# Altium PCB Sensor_voltagV1.2.PcbDoc
Units mm, origin at the board's own origin, x right, y up, seen from the top; angles counter-clockwise.
Board outline 65.4 x 19.09 mm, 2 copper layers (Top Layer, Bottom Layer), stack 1.58 mm thick; 38 components, 18 nets, 94 pads, 17 vias.
Unrouted connection lines stored in the file: 1.
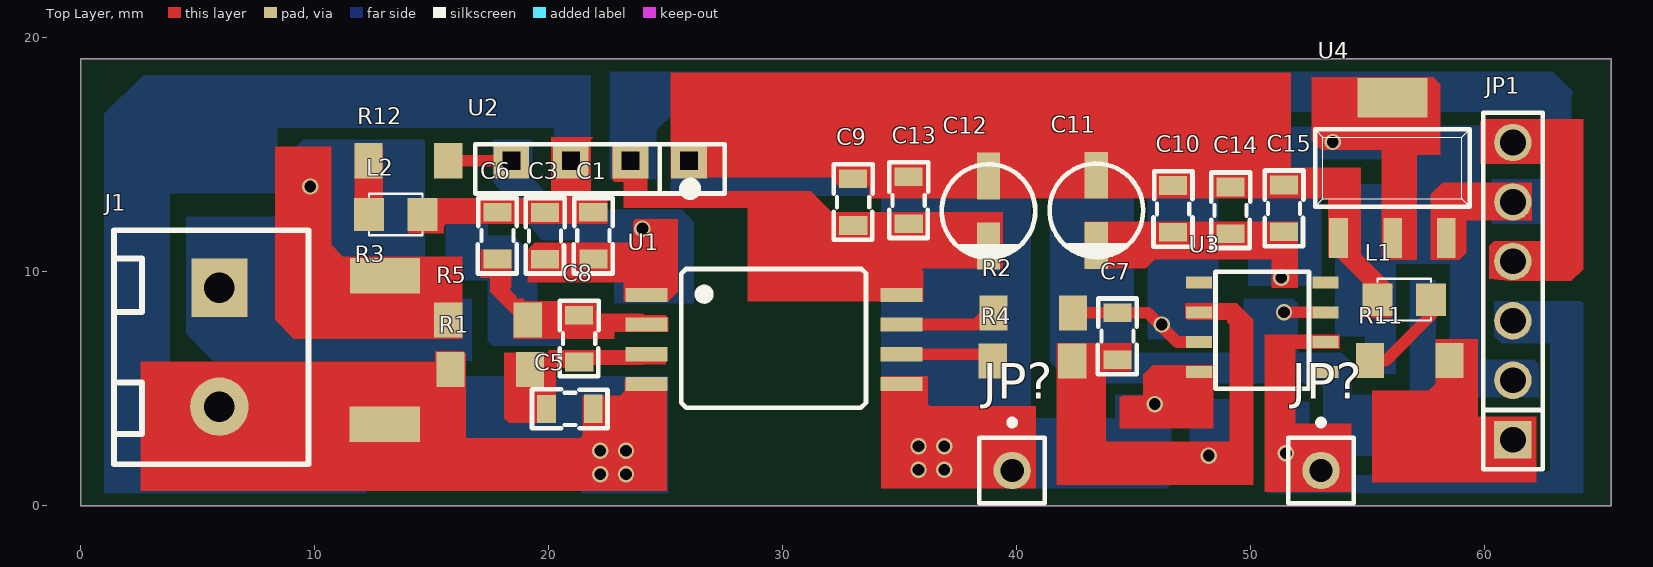
[diagram p0: Top Layer view]
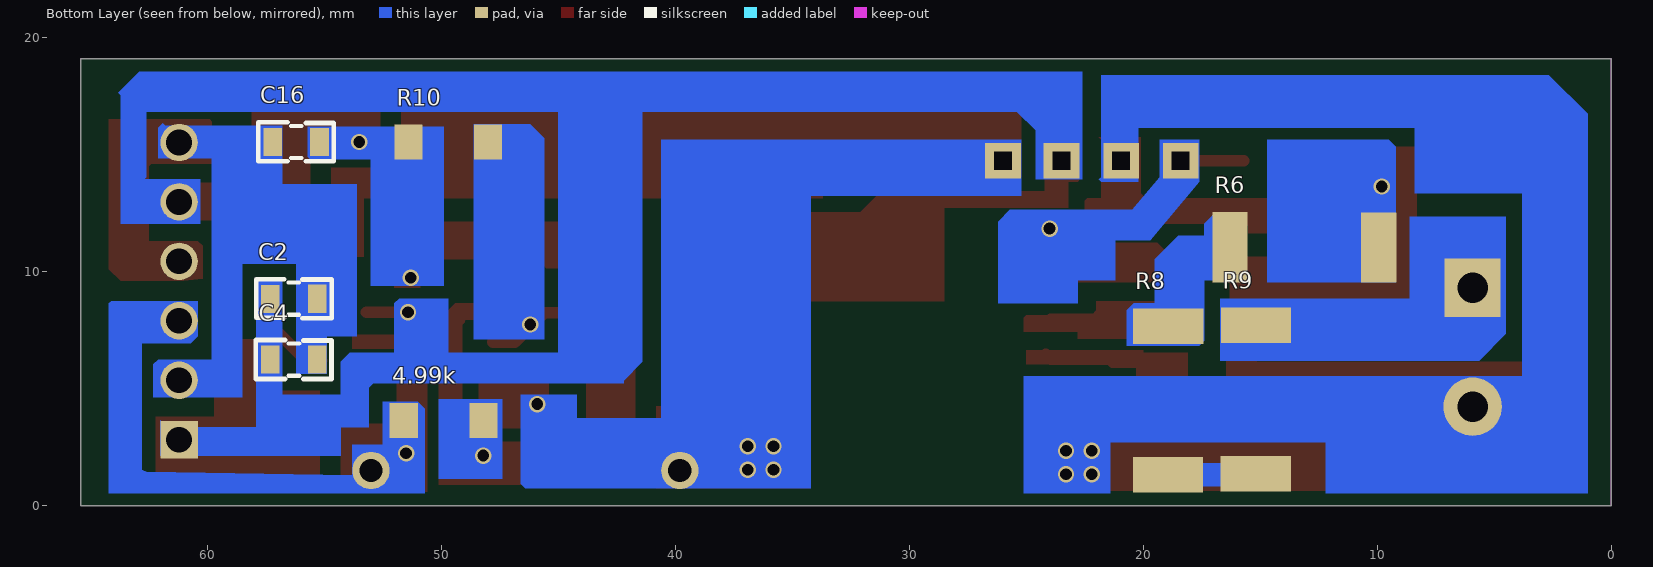
[diagram p1: Bottom Layer view, seen from below]
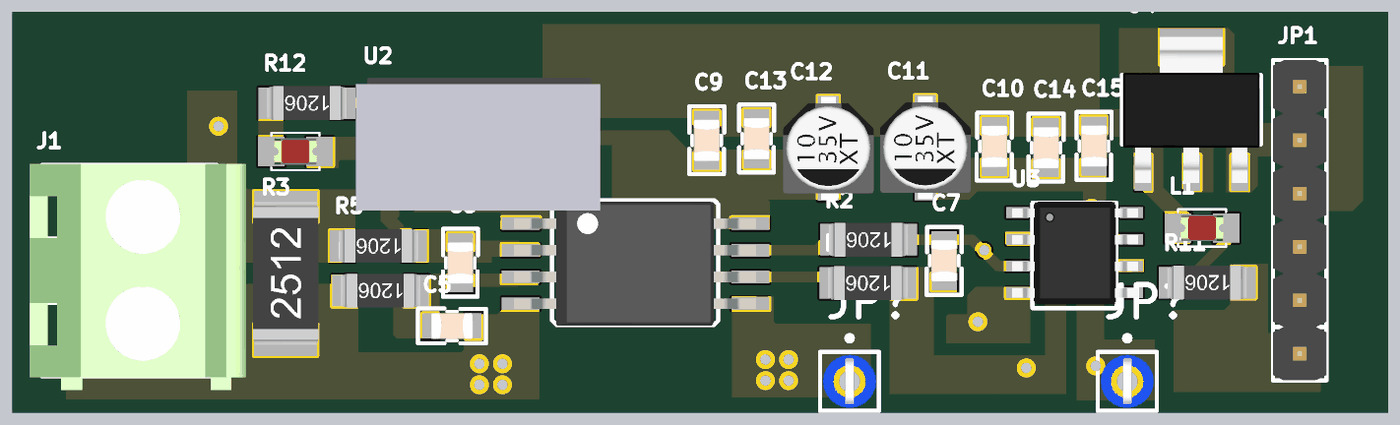
[diagram p2: 3D render of the assembled board from above, using the file's embedded part models]
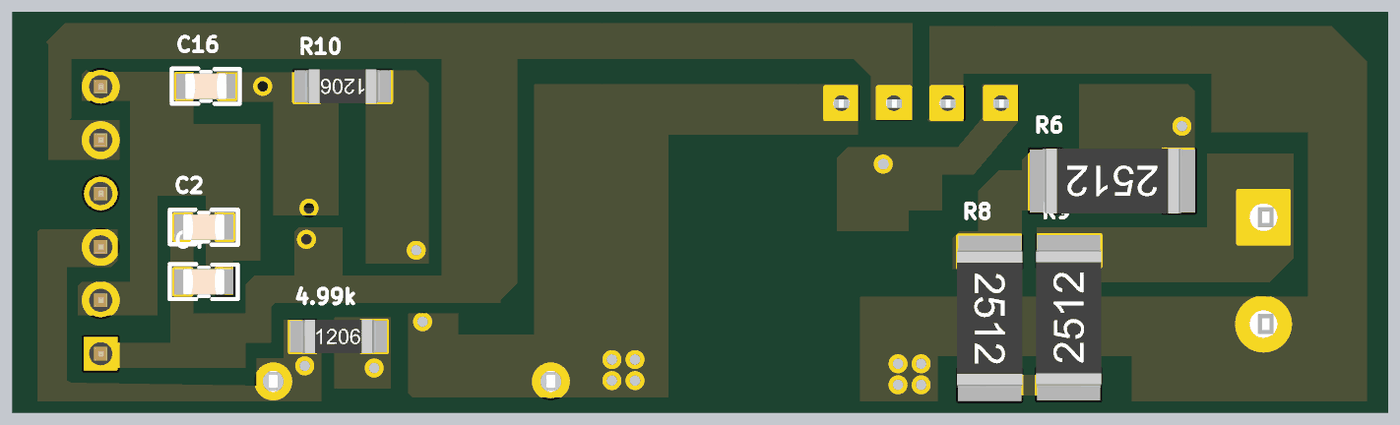
[diagram p3: 3D render of the assembled board from below, using the file's embedded part models]

## Layer stack, top to bottom
Top Solder: solder mask 0.01, Solder Resist, Dk 3.5
Top Layer: signal copper 0.035
Dielectric 1: dielectric 1.51, FR-4, Dk 4.8
Bottom Layer: signal copper 0.035
Bottom Solder: solder mask 0.01, Solder Resist, Dk 3.5

## Board outline
0,0 65.4,0 65.4,19.092 0,19.092

## Design rules (kind name [scope] priority, off if disabled: settings)
Clearance [All] p1: gap=0.5
PolygonConnect [All] p1: connectstyle=Relief reliefconductorwidth=0.254 reliefentries=4 polygonreliefangle="90 Angle" airgapwidth=0.254
RoutingVias [All] p1: holewidth=0.711 width=1.27 viastyle="Through Hole" minholewidth=0.711 minwidth=1.27 maxholewidth=0.711 maxwidth=1.27
SolderMaskExpansion [All] p1: expansion=0.102
Width [All] p1: maxlimit=2 minlimit=0.5 preferedwidth=1
30 further rules are at their usual default settings.

## Components (designator, comment, footprint, x,y, rotation, side; value= is the part's Value field where it differs from the comment)
4.99k "10K" RES1206 49.9,3.638 r180 bottom
C1 "0.1uF" "Tu 0805_N" 21.9,11.538 r90 top
C2 "0.1uF" "Tu 0805_N" 56.3,8.838 r0 bottom
C3 "1uF" "Tu 0805_N" 19.84,11.528 r270 top
C4 "1uF" "Tu 0805_N" 56.3,6.241 r180 bottom
C5 "1nF" "Tu 0805_N" 20.9,4.137 r0 top
C6 "1nF" "Tu 0805_N" 17.8,11.538 r90 top
C7 "10nF" "Tu 0805_N" 44.297,7.238 r90 top
C8 "10nF" "Tu 0805_N" 21.3,7.137 r270 top
C9 "1uF" "Tu 0805_N" 33.01,12.968 r270 top
C10 "1uF" "Tu 0805_N" 46.68,12.678 r90 top
C11 "10uF_16V" tu_4x5.4mm 43.4,12.618 r90 top
C12 "10uF_16V" tu_4x5.4mm 38.79,12.587 r90 top
C13 "10nF" "Tu 0805_N" 35.38,13.047 r270 top
C14 "10nF" "Tu 0805_N" 49.14,12.618 r270 top
C15 "10nF" "Tu 0805_N" 51.42,12.698 r270 top
C16 "10nF" "Tu 0805_N" 56.2,15.541 r180 bottom
J1 "domino" domino_2pin_5.08mm 5.92,6.767 r270 top
JP1 "JP 1x6 2.54" "JP 1X6 DT" 61.2,2.818 r90 top
JP? "JP 1x1 2.54" test_point 53,1.5 r0 top
JP? "JP 1x1 2.54" test_point 39.8,1.5 r0 top
L1 "LED 0805" LED-0805-Red 57.7,8.798 r180 top
L2 "LED 0805" LED-0805-Red 12.314,12.438 r0 top
R1 "10K" RES1206 17.5,5.817 r180 top
R2 "10K" RES1206 40.7,8.237 r180 top
R3 "10k" RES_2512 13.2,6.638 r90 top
R4 "10K" RES1206 40.67,6.178 r180 top
R5 "10K" RES1206 17.4,7.938 r180 top
R6 "5M" RES_2512 13.1,11.238 r0 bottom
R8 "5M" RES_2512 19.14,4.503 r270 bottom
R9 "5M" RES_2512 14.982,4.524 r90 bottom
R10 "4.99k" RES1206 49.7,15.538 r0 bottom
R11 "10K" RES1206 56.8,6.198 r180 top
R12 "10K" RES1206 14,14.737 r180 top
U1 "AMC_1301" SOIC_8_SO8W 30,7.738 r0 top
U2 "DC_DC_5V" B0505S/D-1W 22.14,14.437 r0 top
U3 "opamp_LM741" LM741 50.49,7.488 r0 top
U4 "AMS1117_3.3V" TO-252 56.05,14.427 r0 top

## Footprints (in the part's own frame and the unit in brackets; to place one, negate y for a bottom-side part, rotate by r counter-clockwise, add the part's x,y. Pads: shape width x height; smd on the part's side, far side on the other; paste and mask are expansions set on the pad)
B0505S/D-1W [mm] "B0512S/D-1W"
  rect 1.52x1.52 hole 0.75 square: 1(3.85,0.3) 2(1.35,0.3) 3(-1.2,0.3) 4(-3.74,0.3)
  silkscreen extent -5.28,-1.12 5.38,1, body extent -5.8,-4.8 5.8,1.52, height 18.66
domino_2pin_5.08mm [mm]
  rect 2.5x2.4 hole 1.3: 1(-2.54,0)
  round 2.5 hole 1.3: 2(2.54,0)
  silkscreen extent -5,-4.5 5,3.8, body extent -5.08,-5.1 5.68,5.2, height 13.59
"JP 1X6 DT" [mm] "6 pins, 1 row, straight, gold plating"
  rect 1.6x1.6 hole 1.1: 1(0,0)
  round 1.6 hole 1.1: 2(2.54,0) 3(5.08,0) 4(7.62,0) 5(10.16,0) 6(12.7,0)
  silkscreen extent -1.27,-1.27 13.97,1.27, body extent -1.27,-1.27 13.97,1.27, height 8.54
LED-0805-Red [mil]
  rect 50x55 smd: 1(0,0) 2(90,0)
  silkscreen extent 0,-35 90,35, body extent 5,-25 85,25, height 43
LM741 [mm] "LM741"
  rect 1.1x0.51 smd: 1(-2.7,2.04) 3(-2.7,-0.5) 4(-2.7,-1.77) 5(2.7,-1.77) 6(2.7,-0.5) 7(2.7,0.77) 8(2.7,2.04)
  rect 1.1x0.52 smd: 2(-2.7,0.77)
  silkscreen extent -2,-2.5 2,2.5, body extent -2.98,-2.33 3.02,2.57, height 1.7
RES1206 [mm]
  rect 1.2x1.5 smd: 1(-1.7,0) 2(1.7,0)
  body extent -1.9,-0.8 1.9,0.8, height 0.6
RES_2512 [mm]
  rect 1.5x3 smd: 1(3.185,0.2)
  rect 1.524x3 smd: 2(-3.166,0.208)
  body extent -3.4,-1.35 3.4,1.75, height 0.6
SOIC_8_SO8W [mm] "AMC_1301"
  rect 1.8x0.6 smd: 1(-5.832,1.27) 2(-5.832,0) 3(-5.832,-1.27) 4(-5.832,-2.54) 5(5.08,-2.54) 6(5.08,-1.27) 7(5.08,0) 8(5.08,1.27)
  silkscreen extent -4.35,-3.55 3.55,2.37, body extent -6.15,-3.58 5.35,2.32, height 2.7
test_point [mm] "1pins, 1 row, straight, gold plating"
  round 1.6 hole 1: 1(0,0)
  silkscreen extent -1.4,-1.4 1.4,2.17, body extent -1.27,-1.27 1.27,1.27, height 4.89
TO-252 [mm] "TO-252"
  rect 0.8x1.705 smd: 1(-2.3,-3) 2(0.02,-3) 3(2.3,-3)
  rect 3x1.705 smd: 2(0,3)
  silkscreen extent -3.3,-1.65 3.3,1.65, body extent -3.25,-3.5 3.25,3.46, height 1.7
"Tu 0805_N" [mm] "Compoment SMD 80x50mil"
  rect 0.8x1.2 smd: 1(-1,-0.003) 2(1,0)
  silkscreen extent -1.62,-0.83 1.61,0.83, body extent -1,-0.62 1,0.63, height 1.26
tu_4x5.4mm [mm]
  rect 2x1 smd: 1(-1.5,0) 2(1.5,0)
  silkscreen extent -2,-2 2,2, body extent -2.45,-2.15 2.45,2.15, height 5.4

## Part data
4.99k R1 R2 R3 R4 R5 R6 R8 R9 R10 R11 R12: library part 311-0.0GRTR-ND
C1 C2 C3 C4 C5 C6 C7 C8 C9 C10 C13 C14 C15 C16: library part cap_0805
C11 C12: library part capacitor_electric, "capacitor_electric"
JP1: library part "JP 1x6 2.54 Duc Thang", "C?m"
JP? JP?: library part "JP 1x1 2.54 Duc Thang", "C?m"
L1 L2: library part "LED 0805 Do", "Dán"
U2: library part DC_DC_5v
U4: library part AMS1117CD, "AMS1117CD"

## Via types
v1: diameter 0.7, hole 0.5, Top Layer to Bottom Layer, 17 vias

## Nets (pads, with @x,y where several pads share a name; then routed paths per layer and width w, separated by ;. In a path a pad name is that pad's centre, name@x,y a point inside that pad or via, vN(x,y) a via of type N, cw(c..) or ccw(c..) an arc to the next point about the centre after c; other vN are vias at no path point)
GND_D: C2.1 C4.2 C9.1 C10.2 C11.2 C12.2 C13.1 C14.1 C15.1 C16.1 JP1.2 JP1.4 JP1.6 JP?.1@39.8,1.5 L1.2 U1.5 U2.1 U3.4 U4.1 | length 106.7
  Top Layer w0.5: U2.1 32.237,14.737 C9.1 35.297,13.968 C13.1 38.75,14.048 C12.2 43.37,14.087 C11.2 46.24,14.118 C10.2 49.076,13.678 C14.1 51.337,13.618 C15.1 53.44,13.698 53.75,13.387 U4.1 53.75,10.988 55.414,9.324 L1.2 ; U1.5 35.08,3.357 v1@36,2.438 ; v1(45.9,4.337) 45.9,5.038 46.58,5.718 U3.4 ; JP1.4 62.5,10.438 63,10.937 63,14.938 62.42,15.518 JP1.6
  Bottom Layer w0.5: U2.1 35.2,14.737 36,13.938 36,2.438 44.1,2.438 45.9,4.238 v1(45.9,4.337) ; C4.2 C2.1 55.3,12.737 55.8,13.238 58.4,13.238 ; C16.1 57.22,15.518 58.4,15.518 ; JP1.2 59.68,5.358 59.3,5.738 59.3,12.738 58.8,13.238 58.4,13.238 ; JP1.6 58.4,15.518 ; 58.4,13.238 58.4,15.518
  other v1: 35.8,1.538 36.9,1.538 35.8,2.537 36.9,2.537
GND_P: C1.2 C3.1 C5.2 C6.2 J1.2 L2.2 R1.2 R3.2 U1.4 U2.3 | length 68.1
  Top Layer w0.5: J1.2 6.676,3.471 R3.2 14.9,3.471 ; L2.2 17.7,12.438 C6.2 19.827,12.538 C3.1 20.8,12.528 ; R1.2 15.8,4.038 15.234,3.471 14.9,3.471 ; U2.3 20.94,12.668 20.8,12.528 ; C1.2 21.89,12.528 20.8,12.528 ; U1.4 24.168,4.205 24.1,4.138 C5.2 21.9,2.638 15.734,2.638 14.9,3.471
  Bottom Layer w0.5: J1.2 4.51,4.227 2.4,6.338 2.4,14.137 5.4,17.137 20.5,17.137 20.94,16.698 U2.3
  other v1: 22.2,1.338 23.3,1.338 22.2,2.338 23.3,2.338
Net4.99k_1: 4.99k.1 JP1.3 JP?.1@53,1.5 U3.6 | length 29.4
  Top Layer w0.5: v1(51.5,2.238) 51.2,2.238 50.9,2.538 50.9,6.737 51.15,6.988 U3.6
  Bottom Layer w0.5: 4.99k.1 51.5,3.538 v1(51.5,2.238) 51.5,1.937 52.4,1.038 62.7,1.038 63.4,1.737 63.4,6.838 62.34,7.898 JP1.3
Net4.99k_2: 4.99k.2 C7.1 R4.1 U3.2 | length 21.8
  Top Layer w0.5: C7.1 42.43,6.238 R4.1 42.37,2.567 42.7,2.238 49.2,2.238 49.4,2.438 49.4,7.838 48.98,8.258 U3.2
  Bottom Layer w0.5: v1(48.2,2.137) 48.2,3.438 48,3.638 4.99k.2
NetC1_1: C1.1 C3.2 R12.1 U1.1 U2.4 | length 17.6
  Top Layer w0.5: R12.1 U2.4 ; C3.2 21.893,10.527 C1.1 23.9,10.537 24.168,10.27 ; v1(24,11.837) 24.168,11.669 24.168,10.27 ; U1.1 24.168,10.27
  Bottom Layer w0.5: U2.4 18.4,13.437 20,11.837 v1(24,11.837)
NetC2_2: C2.2 C4.1 C9.2 C12.1 C13.2 JP1.1 JP1.5 R11.1 U1.8 U2.2 U3.7 U4.3 | length 121.8
  Top Layer w0.5: U2.2 23.49,13.447 23.95,12.987 31.25,12.987 32.27,11.967 C9.2 35.3,11.967 C13.2 ; U1.8 35.38,9.308 C13.2 ; C12.1 37.83,12.047 C13.2 ; v1(51.42,8.258) U3.7 ; U4.3 58.35,12.688 58.64,12.978 JP1.5 ; R11.1 58.5,2.938 58.62,2.818 JP1.1
  Bottom Layer w0.5: U2.2 23.49,17.328 24.09,17.927 42.99,17.927 43,17.938 43,17.927 ; v1(51.42,8.258) 51.2,8.037 51.2,5.737 ; C2.2 C4.1 57.2,6.138 57.2,3.838 ; JP1.1 60.284,2.818 60.104,2.638 57.4,2.638 57.2,2.837 57.2,3.838 ; JP1.5@61.34,12.838 JP1.5 62.53,12.978 63,13.447 63,17.478 62.55,17.927 43,17.927 ; 43,17.927 43,6.538 43.8,5.737 51.2,5.737 ; 51.2,5.737 53.2,5.737 53.7,5.238 53.7,4.337 54.1,3.938 56.7,3.938 57,3.638 57.2,3.838
NetC5_1: C5.1 C8.2 R1.1 U1.3 | length 7.2
  Top Layer w0.5: C5.1 19.2,4.834 R1.1 19.52,6.137 C8.2 21.41,6.247 23.948,6.247 U1.3
NetC6_1: C6.1 C8.1 R5.1 U1.2 | length 8.6
  Top Layer w0.5: C6.1 17.803,9.234 R5.1 19.3,8.137 C8.1 21.297,7.958 23.948,7.958 U1.2
NetC7_2: C7.2 R2.1 R10.1 U3.3 | length 15.6
  Top Layer w0.5: R2.1 C7.2 45.6,8.238 46.85,6.988 U3.3 ; R2.1@42.4,8.497 R2.1@42.56,8.337
  Bottom Layer w0.5: v1(46.2,7.738) 46.2,15.238 46.5,15.538 R10.1
NetC10_1: C10.1 C11.1 C14.2 C15.2 C16.2 R10.2 U4.2 | length 28.5
  Top Layer w0.5: C11.1 46.123,11.118 C10.1 49.08,11.678 C14.2 51.34,11.617 C15.2 51.42,9.858 v1(51.3,9.737) ; v1(53.5,15.538) 56.07,15.538 ; U4.2@56.05,17.427 56.07,17.407 56.07,15.538 ; U4.2@56.07,11.428 56.07,15.538
  Bottom Layer w0.5: v1(51.3,9.737) 51.4,9.837 R10.2 v1(53.5,15.538) 55.196,15.538 C16.2
NetJ1_1: J1.1 R9.1 | length 9.9
  Bottom Layer w0.5: J1.1 7.519,7.709 R9.1
NetL1_1: L1.1 R11.2 | length 4.1
  Top Layer w0.5: R11.2 55.76,6.198 57.7,8.137 L1.1
NetL2_1: L2.1 R12.2 | length 2.3
  Top Layer w0.5: R12.2 12.3,12.451 L2.1
NetR2_2: R2.2 U1.7 | length 4.2
  Top Layer w0.5: U1.7 38.24,7.738 R2.2@39,8.497
NetR3_1: R3.1 R5.2 R6.2 | length 13.6
  Top Layer w0.5: v1(9.8,13.638) 9.8,10.338 10.315,9.823 R3.1 15.115,9.823 15.7,9.237 R5.2
  Bottom Layer w0.5: v1(9.8,13.638) 9.8,11.164 R6.2
NetR4_2: R4.2 U1.6 | length 4
  Top Layer w0.5: U1.6 38.68,6.468 R4.2
NetR6_1: R6.1 R8.2 | length 5.6
  Bottom Layer w0.5: R6.1 18.3,11.038 18.9,10.438 18.9,7.701 R8.2
NetR8_1: R8.1 R9.2 | length 3.8
  Bottom Layer w0.5: R9.2 R9.2@15.23,1.318
  Bottom Layer w1: R9.2@15.23,1.318 R8.1
pads on no net: U3.1 U3.5 U3.8

## Keep-outs
Keep-Out Layer:
  the board outline again, w0.05

## Other copper
Top Layer:
  region net GND_D: 48.4,6 45.8,6 45.4,5.6 45.4,4.7 44.5,4.7 44.4,4.6 44.4,3.3 48.4,3.3
  region net GND_P: 2.55,6.138 2.55,0.637 25.05,0.637 25.05,2.688 25.05,5.388 23.25,5.388 23.25,4.888 23.05,4.687 21.45,4.687 21.45,2.987 21.35,2.887 16.45,2.887 16.45,6.488 16.35,6.588 15.15,6.588 15.15,6.138
  region net NetC6_1: 17.1,10.937 17.1,9.737 17.5,9.737 17.5,9.138 18.5,8.137 18.5,7.137 19.6,7.137 20,7.137 20.1,7.137 20.3,7.137 22.8,7.137 22.8,7.437 25.1,7.437 25.1,8.037 25,8.137 22.2,8.137 22,8.337 22,8.738 19,8.738 18.9,8.838 18.6,8.838 18.6,8.938 18.3,9.237 18.4,9.337 18.4,10.937
  region net NetC1_1: 23.3,8.738 25.1,8.738 25.5,9.138 25.5,12.237 23.7,12.237 23.6,12.137 23.6,11.238 19.4,11.238 19.1,10.937 19.1,9.537 23.2,9.537 23.2,8.738
  region net GND_P: 14,13.137 19.9,13.137 20.1,13.337 20.1,15.737 21.9,15.737 21.8,15.637 21.8,13.137 22.4,13.137 22.5,13.037 22.5,12.037 15.6,12.037 15.5,11.937 15.5,11.638 14,11.638
  region net NetL2_1: 11.7,11.837 11.7,15.438 12.8,15.438 12.9,15.338 12.9,11.837
  region net NetR3_1: 16.3,7.137 9.1,7.138 8.3,7.938 8.3,14.838 8.3,15.338 8.8,15.338 10.7,15.338 10.7,11.138 11.2,10.638 16.3,10.638
  region net NetC5_1: 20.3,3.538 18.3,3.538 18.1,3.738 18.1,6.537 18.7,6.537 20,6.538 20,6.638 25,6.638 24.9,6.538 25,6.638 25,6.037 20.3,6.037 20.3,5.937
  region net GND_D: 34.2,5.537 34.2,0.737 40.8,0.737 40.8,4.237 36.3,4.237 36.2,4.337 36.2,5.537
  region net GND_D: 25.2,14.038 25.2,15.538 25.2,18.5 51.7,18.5 51.7,14.437 53.4,14.437 54.7,14.437 54.7,13.137 54.7,10.737 56.1,9.337 56,9.237 56,8.037 54.8,8.037 54.8,9.5 53.663,10.637 53.3,10.637 53.3,13.137 43.1,13.137 34.2,13.137 33.7,13.137 33.7,13.638 32.4,13.638 32.2,13.838 32.2,14.038
  region net NetC2_2: 22.7,15.538 22.7,13.938 22.8,13.838 23.2,13.838 23.2,13.437 23.2,12.738 23.9,12.738 28.5,12.737 28.5,8.738 34,8.738 36,8.738 36,10.038 35.9,10.138 39.4,10.138 39.4,12.237 39.4,12.538 39.1,12.538 35.9,12.538 32.1,12.538 31.2,13.437 24.2,13.437 24.2,15.438 24.3,15.538
  region net Net4.99k_2: 44.9,5.837 44.9,6.937 41.9,6.937 41.7,6.937 41.7,6.737 41.7,0.9 49.163,0.9 50.1,0.9 50.1,1.837 50.1,7.938 49.4,8.638 47.2,8.638 47.2,8.037 47.3,7.938 49,7.938 49,7.838 49.1,7.738 49.1,2.738 43.8,2.738 43.8,3.037 43.8,5.737 44.9,5.737
  region net NetC10_1: 42.9,10.138 45.5,10.138 45.9,10.538 50.9,10.537 50.9,9.3 51.563,9.3 52,9.3 52,9.737 52,12.137 42.9,12.137
  region net NetC10_1: 57.1,10.5 57.1,15 58.1,15 58.1,15.7 58.1,18 57.8,18.3 52.6,18.3 52.6,15.6 53,15.2 55.6,15.2 55.6,10.7 55.8,10.5
  region net NetC2_2: 62.2,3.8 62.2,1 55.2,1 55.2,2.7 55.2,4.9 57.6,4.9 57.9,5.2 57.9,7.1 59.2,7.1 59.7,7.1 59.7,6.6 59.7,3.8
  region net NetC2_2: 62,12.2 62,13.8 58.2,13.8 57.7,13.3 57.7,10.5 58.9,10.5 59.2,10.8 59.2,12.2
  region net GND_D: 61,9.6 63.7,9.6 64.2,10.1 64.2,16.5 59.9,16.5 59.8,16.4 59.8,14.6 62.4,14.6 62.5,14.5 62.5,11.3 60.4,11.3 60.2,11.1 60.2,9.7
  region net Net4.99k_1: 53.8,7.3 50.6,7.3 50.6,0.6 54.3,0.6 54.3,3.5 53.7,3.5 51.9,3.5 51.9,6.7 53.8,6.7
Bottom Layer:
  region net NetJ1_1: 4.5,7.337 5.637,6.2 16.7,6.2 16.7,8.838 8.6,8.838 8.6,11.338 8.6,12.337 7.6,12.337 4.5,12.337
  region net NetR3_1: 9.2,15.338 9.5,15.637 14.7,15.637 14.7,9.537 9.2,9.537
  region net GND_P: 1,0.537 12.2,0.537 12.2,2.7 21.4,2.7 21.4,0.537 23.3,0.537 25.1,0.537 25.1,5.537 22.37,5.537 12.2,5.537 7.4,5.537 3.8,5.537 3.8,13.338 8.4,13.337 8.4,16.137 20.2,16.138 20.2,13.838 21.8,13.838 21.9,13.938 21.8,14.038 21.8,18.4 2.662,18.4 1,16.737 1,2.438
  region net NetR6_1: 15.6,9.637 15.6,12.538 16.9,12.538 17.4,12.037 17.4,11.538 18.5,11.538 19.5,10.537 19.5,8.638 20.4,8.638 20.7,8.337 20.7,6.837 17.6,6.837 17.4,7.037 17.4,9.637
  region net NetC1_1: 19.3,14.038 19.3,15.637 17.6,15.637 17.6,13.838 19.7,11.338 21.2,11.338 21.2,9.637 22.8,9.637 22.8,8.638 26.2,8.638 26.2,11.338 26.2,12.137 25.7,12.638 20.467,12.638
  region net GND_D: 25.2,13.938 25.2,15.637 37.3,15.637 40.6,15.637 40.6,0.737 35.8,0.737 34.2,0.737 34.2,2.338 34.2,13.237 25.2,13.237
  region net GND_D: 44.2,3.738 44.2,4.737 45.2,4.737 46.6,4.737 46.6,0.937 46.4,0.737 34.6,0.737 34.6,3.738
  region net NetC2_2: 22.6,13.938 22.6,18.537 62.9,18.537 63.8,17.638 63.7,17.538 63.7,12.037 60.3,12.037 60.3,13.937 62.7,13.938 62.6,14.038 62.6,16.837 25.4,16.837 24.6,16.037 24.6,13.937
  region net NetC2_2: 41.4,17.638 41.4,6.138 42.2,5.338 42.2,5.238 52.9,5.238 53.1,5.038 53.1,3.338 54.3,3.337 54.3,2.137 62,2.137 62,3.638 61.7,3.337 57.9,3.337 57.9,9.537 57.9,9.637 57.8,9.637 57.7,9.637 56.8,9.637 56.8,9.537 56.8,4.737 54.3,4.737 54.3,6.137 53.9,6.538 52,6.538 52,8.638 51.8,8.838 49.7,8.838 49.7,6.538 45,6.538 45,16.837 45,17.738 44.1,17.738 41.4,17.738
  region net Net4.99k_1: 52.5,4.437 51,4.437 50.7,4.137 50.7,0.537 64.2,0.537 64.2,1.138 64.2,1.338 64.2,8.638 64.1,8.738 60.4,8.738 60.4,7.237 60.7,6.937 62.8,6.937 62.8,1.538 62.6,1.438 53.8,1.3 53.8,2.6 52.5,2.6
  region net GND_D: 56.8,13.738 53.6,13.738 53.6,8.538 53.6,7.237 54.9,7.237 54.9,5.637 56.2,5.637 56.2,10.337 57.3,10.338 58.1,10.338 58.5,10.338 58.5,4.637 59,4.637 62.3,4.637 62.3,6.037 62.1,6.238 59.8,6.238 59.8,14.637 59.8,14.837 62.1,14.837 62.1,16.138 61.9,16.338 61.8,16.238 56.8,16.238
  region net NetC10_1: 49.9,9.4 49.9,16.2 50.9,16.2 55.7,16.2 55.7,14.9 55.6,14.8 53,14.8 53,9.4
  region net NetC7_2: 48.6,16.3 46.2,16.3 45.6,15.7 45.6,7.1 48.6,7.1
  region net Net4.99k_2: 47.4,4.55 47.4,1.15 50.1,1.15 50.1,3.75 50.1,4.55 49.3,4.55